# Altium PCB SolarArray3.PcbDoc
Units mm, origin at the board's own origin, x right, y up, seen from the top; angles counter-clockwise.
Board outline 82 x 320 mm, 2 copper layers (Top Layer, Bottom Layer), stack 1.567 mm thick; 65 components, 36 nets, 162 pads, 0 vias.
Unrouted connection lines stored in the file: 79.
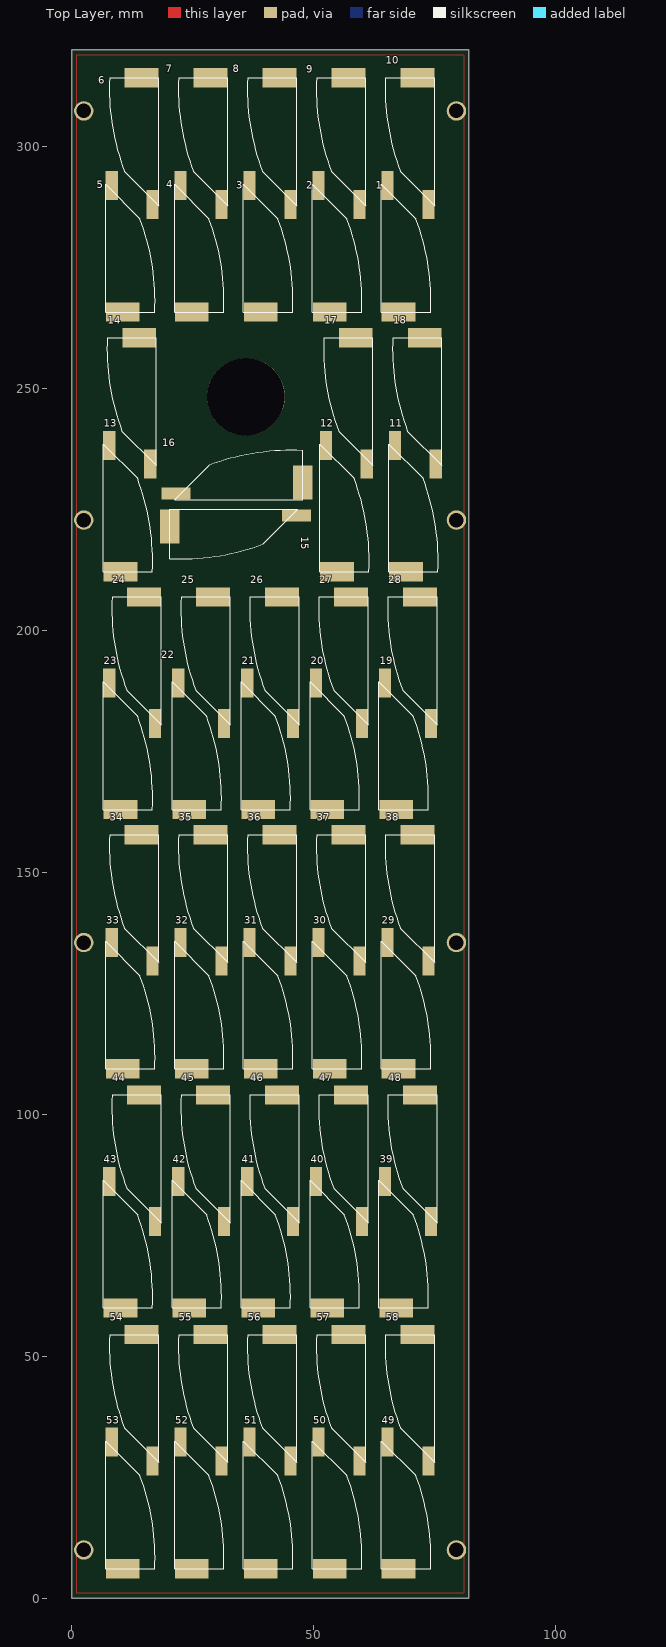
[diagram p0: Top Layer view]
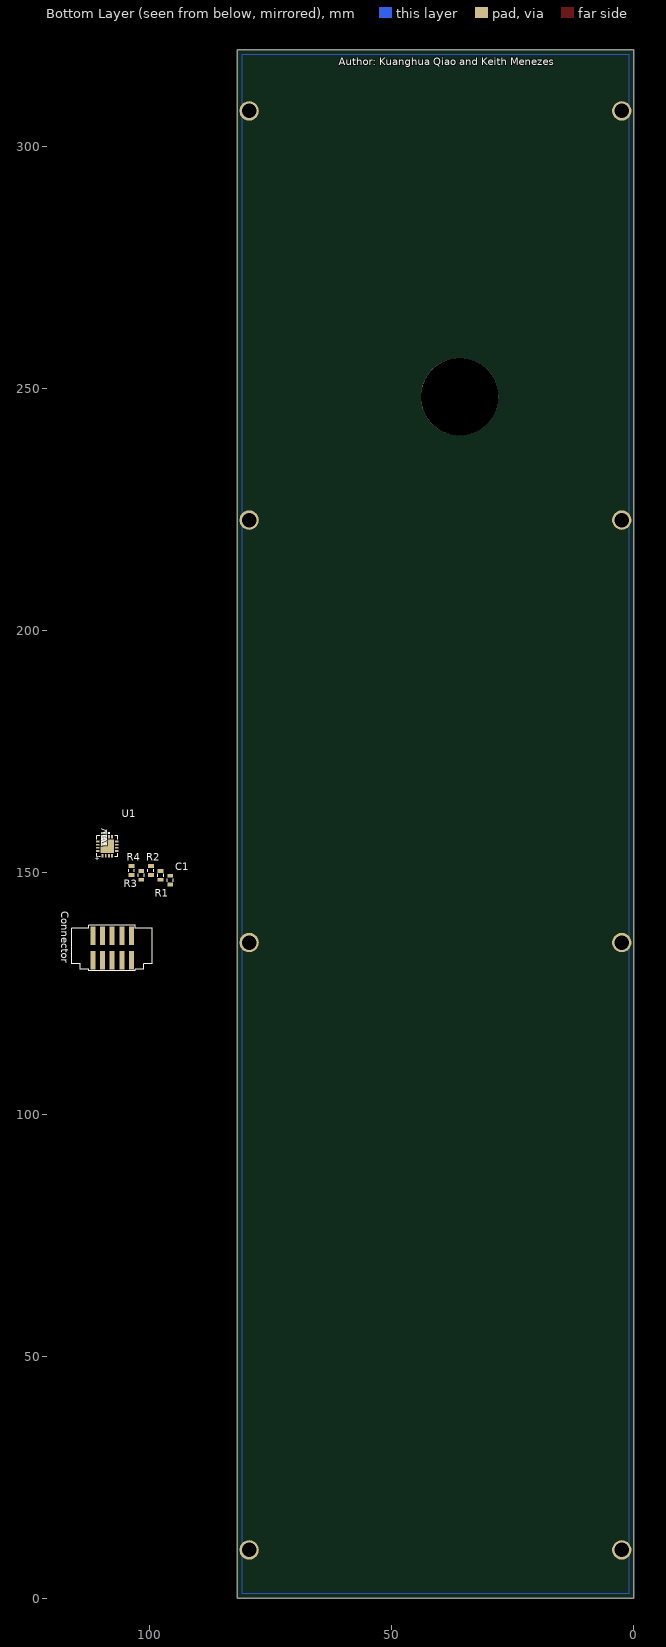
[diagram p1: Bottom Layer view, seen from below]

## Layer stack, top to bottom
Top Solder: solder mask 0.0102, Solder Resist, Dk 3.5
Top Layer: signal copper 0.0356
Dielectric 1: dielectric 1.4961, FR-4, Dk 4.8
Bottom Layer: signal copper 0.0356
Bottom Solder: solder mask 0.0102, Solder Resist, Dk 3.5

## Board outline
82,0 82,320 0,320 0,0

## Design rules (kind name [scope] priority, off if disabled: settings)
Clearance [All] p1: gap=0.254 ignorepadtopadclearanceinfootprint=FALSE except(0: Arc-Hole Track-Hole SMDPad-Hole THPad-Hole Via-Hole Fill-Hole Poly-Hole Region-Hole Text-Hole)
PolygonConnect [All] p1: connectstyle=Relief reliefconductorwidth=0.254 reliefentries=4 polygonreliefangle="90 Angle" airgapwidth=0.254
RoutingVias [All] p1: holewidth=0.711 width=1.27 viastyle="Through Hole" minholewidth=0.711 minwidth=1.27 maxholewidth=0.711 maxwidth=1.27
SolderMaskExpansion [All] p1: expansion=0.102
Width [All] p1: maxlimit=1 minlimit=0.254 preferedwidth=0.254 minimp=50.000000 maximp=50.000000 favimp=50.000000
30 further rules are at their usual default settings.

## Components (designator, comment, footprint, x,y, rotation, side; value= is the part's Value field where it differs from the comment)
1 "Trisol X Solar Wing" PCBCOMPONENT_1 64,295 r270 top
2 "Trisol X Solar Wing" PCBCOMPONENT_1 49.75,295 r270 top
3 "Trisol X Solar Wing" PCBCOMPONENT_1 35.5,295 r270 top
4 "Trisol X Solar Wing" PCBCOMPONENT_1 21.25,295 r270 top
5 "Trisol X Solar Wing" PCBCOMPONENT_1 7,295 r270 top
6 "Trisol X Solar Wing" PCBCOMPONENT_1 18,285 r90 top
7 "Trisol X Solar Wing" PCBCOMPONENT_1 32.25,285 r90 top
8 "Trisol X Solar Wing" PCBCOMPONENT_1 46.5,285 r90 top
9 "Trisol X Solar Wing" PCBCOMPONENT_1 60.75,285 r90 top
10 "Trisol X Solar Wing" PCBCOMPONENT_1 75,285 r90 top
11 "Trisol X Solar Wing" PCBCOMPONENT_1 65.5,241.3 r270 top
12 "Trisol X Solar Wing" PCBCOMPONENT_1 51.25,241.3 r270 top
13 "Trisol X Solar Wing" PCBCOMPONENT_1 6.5,241.3 r270 top
14 "Trisol X Solar Wing" PCBCOMPONENT_1 17.5,231.3 r90 top
15 "Trisol X Solar Wing" PCBCOMPONENT_1 49.5,225 r180 top
16 "Trisol X Solar Wing" PCBCOMPONENT_1 18.5,227 r0 top
17 "Trisol X Solar Wing" PCBCOMPONENT_1 62.25,231.3 r90 top
18 "Trisol X Solar Wing" PCBCOMPONENT_1 76.5,231.3 r90 top
19 "Trisol X Solar Wing" PCBCOMPONENT_1 63.5,192.2 r270 top
20 "Trisol X Solar Wing" PCBCOMPONENT_1 49.25,192.2 r270 top
21 "Trisol X Solar Wing" PCBCOMPONENT_1 35,192.2 r270 top
22 "Trisol X Solar Wing" PCBCOMPONENT_1 20.75,192.2 r270 top
23 "Trisol X Solar Wing" PCBCOMPONENT_1 6.5,192.2 r270 top
24 "Trisol X Solar Wing" PCBCOMPONENT_1 18.5,177.7 r90 top
25 "Trisol X Solar Wing" PCBCOMPONENT_1 32.75,177.7 r90 top
26 "Trisol X Solar Wing" PCBCOMPONENT_1 47,177.7 r90 top
27 "Trisol X Solar Wing" PCBCOMPONENT_1 61.25,177.7 r90 top
28 "Trisol X Solar Wing" PCBCOMPONENT_1 75.5,177.7 r90 top
29 "Trisol X Solar Wing" PCBCOMPONENT_1 64,138.6 r270 top
30 "Trisol X Solar Wing" PCBCOMPONENT_1 49.75,138.6 r270 top
31 "Trisol X Solar Wing" PCBCOMPONENT_1 35.5,138.6 r270 top
32 "Trisol X Solar Wing" PCBCOMPONENT_1 21.25,138.6 r270 top
33 "Trisol X Solar Wing" PCBCOMPONENT_1 7,138.6 r270 top
34 "Trisol X Solar Wing" PCBCOMPONENT_1 18,128.6 r90 top
35 "Trisol X Solar Wing" PCBCOMPONENT_1 32.25,128.6 r90 top
36 "Trisol X Solar Wing" PCBCOMPONENT_1 46.5,128.6 r90 top
37 "Trisol X Solar Wing" PCBCOMPONENT_1 60.75,128.6 r90 top
38 "Trisol X Solar Wing" PCBCOMPONENT_1 75,128.6 r90 top
39 "Trisol X Solar Wing" PCBCOMPONENT_1 63.5,89.2 r270 top
40 "Trisol X Solar Wing" PCBCOMPONENT_1 49.25,89.2 r270 top
41 "Trisol X Solar Wing" PCBCOMPONENT_1 35,89.2 r270 top
42 "Trisol X Solar Wing" PCBCOMPONENT_1 20.75,89.2 r270 top
43 "Trisol X Solar Wing" PCBCOMPONENT_1 6.5,89.2 r270 top
44 "Trisol X Solar Wing" PCBCOMPONENT_1 18.5,74.8 r90 top
45 "Trisol X Solar Wing" PCBCOMPONENT_1 32.75,74.8 r90 top
46 "Trisol X Solar Wing" PCBCOMPONENT_1 47,74.8 r90 top
47 "Trisol X Solar Wing" PCBCOMPONENT_1 61.25,74.8 r90 top
48 "Trisol X Solar Wing" PCBCOMPONENT_1 75.5,74.8 r90 top
49 "Trisol X Solar Wing" PCBCOMPONENT_1 64,35.3 r270 top
50 "Trisol X Solar Wing" PCBCOMPONENT_1 49.75,35.3 r270 top
51 "Trisol X Solar Wing" PCBCOMPONENT_1 35.5,35.3 r270 top
52 "Trisol X Solar Wing" PCBCOMPONENT_1 21.25,35.3 r270 top
53 "Trisol X Solar Wing" PCBCOMPONENT_1 7,35.3 r270 top
54 "Trisol X Solar Wing" PCBCOMPONENT_1 18,25.3 r90 top
55 "Trisol X Solar Wing" PCBCOMPONENT_1 32.25,25.3 r90 top
56 "Trisol X Solar Wing" PCBCOMPONENT_1 46.5,25.3 r90 top
57 "Trisol X Solar Wing" PCBCOMPONENT_1 60.75,25.3 r90 top
58 "Trisol X Solar Wing" PCBCOMPONENT_1 75,25.3 r90 top
C1 "100pF" 0805 95.8,148.4 r270 bottom
Connector "T2M-105-01-L-D-SM" T2M-105-01-X-D-SM 107.8,134.4 r180 bottom
R1 "1K" 0805 97.8,149.4 r270 bottom
R2 "1K" 0805 99.8,150.4 r270 bottom
R3 "1K" 0805 101.8,149.4 r270 bottom
R4 "1K" 0805 103.8,150.4 r270 bottom
U1 "ADT7420UCPZ-R2" CP_16_17 108.8,155.4 r90 bottom

## Footprints (in the part's own frame and the unit in brackets; to place one, negate y for a bottom-side part, rotate by r counter-clockwise, add the part's x,y. Pads: shape width x height; smd on the part's side, far side on the other; paste and mask are expansions set on the pad)
0805 [mil]
  rect 32x48 smd: 1(-35.43,0) 2(36,0)
  silkscreen extent -12,-24 12,24
CP_16_17 [mil]
  rect 30x14 smd: 1(-77.5,38.39) 2(-77.5,12.8) 3(-77.5,-12.8) 4(-77.5,-38.39) 9(77.5,-38.39) 10(77.5,-12.8) 11(77.5,12.8) 12(77.5,38.39)
  rect 14x30 smd: 5(-38.39,-77.5) 6(-12.8,-77.5) 7(12.8,-77.5) 8(38.39,-77.5) 13(38.39,77.5) 14(12.8,77.5) 15(-12.8,77.5) 16(-38.39,77.5)
  rect 110x110 smd paste-54.5: 17(0,0)
  silkscreen extent -86,-86 112,86, body extent 0,0 10,10, height 10
PCBCOMPONENT_1 [mm]
  rect 6x2.5 smd: 0(3.048,1.27)
  rect 4x6.985 smd: 1(29.21,3.556)
  silkscreen extent 2.79,0 29.21,10.22, body extent 2.89,0.06 29.19,10.1, height 0.24
T2M-105-01-X-D-SM [mm]
  rect 1.02x3.8 smd mask+0.05: 1(-4,-2.535) 2(-4,2.535) 3(-2,-2.535) 4(-2,2.535) 5(0,-2.535) 6(0,2.535) 7(2,-2.535) 8(2,2.535) 9(4,-2.535) 10(4,2.535)
  silkscreen extent -8.36,-4.69 8.31,4.69, body extent -7.84,-4.31 7.84,4.31, height 6.5

## Part data
C1: library part CAP0805_1nF
Connector: library part T2M-105-01-X-D-SM
R1 R2 R3 R4: library part RESISTOR0805-RES_1K
U1: "Imported"

## Free pads (board coordinates)
  round 4 hole 3: 1(2.5,10) 1(2.5,135.5) 1(2.5,222.8) 1(2.5,307.35) 1(79.5,10) 1(79.5,135.5) 1(79.5,222.8) 1(79.5,307.35)
  round 16 hole 16: 1(36,248.3)

## Nets (pads, with @x,y where several pads share a name; then routed paths per layer and width w, separated by ;. In a path a pad name is that pad's centre, name@x,y a point inside that pad or via, vN(x,y) a via of type N, cw(c..) or ccw(c..) an arc to the next point about the centre after c; other vN are vias at no path point)
Net1_0: 1.0 10.1
Net1_1: 1.1 2.1 3.1 4.1 5.1 11.1 12.1 14.1 15.1 19.1 20.1 21.1 22.1 23.1 29.1 30.1 31.1 32.1 33.1 39.1 40.1 41.1 42.1 43.1 49.1 50.1 51.1 52.1 53.1 C1.1 Connector.3 Connector.4 pad.1@2.5,10 pad.1@2.5,135.5 pad.1@2.5,222.8 pad.1@2.5,307.35 pad.1@79.5,10 pad.1@79.5,135.5 pad.1@79.5,222.8 pad.1@79.5,307.35 R2.2 R4.2 U1.11
Net2_0: 2.0 9.1
Net3_0: 3.0 8.1
Net4_0: 4.0 7.1
Net5_0: 5.0 6.1
Net6_0: 6.0 7.0 8.0 9.0 10.0 13.0 16.0 17.0 18.0 24.0 25.0 26.0 27.0 28.0 34.0 35.0 36.0 37.0 38.0 44.0 45.0 46.0 47.0 48.0 54.0 55.0 56.0 57.0 58.0 Connector.1 Connector.2
Net11_0: 11.0 18.1
Net12_0: 12.0 17.1
Net13_1: 13.1 14.0
Net15_0: 15.0 16.1
Net19_0: 19.0 28.1
Net20_0: 20.0 27.1
Net21_0: 21.0 26.1
Net22_0: 22.0 25.1
Net23_0: 23.0 24.1
Net29_0: 29.0 38.1
Net30_0: 30.0 37.1
Net31_0: 31.0 36.1
Net32_0: 32.0 35.1
Net33_0: 33.0 34.1
Net39_0: 39.0 48.1
Net40_0: 40.0 47.1
Net41_0: 41.0 46.1
Net42_0: 42.0 45.1
Net43_0: 43.0 44.1
Net49_0: 49.0 58.1
Net50_0: 50.0 57.1
Net51_0: 51.0 56.1
Net52_0: 52.0 55.1
Net53_0: 53.0 54.1
NetC1_2: C1.2 Connector.5 Connector.6 R1.2 R3.2 U1.12
NetConnector_7: Connector.7 Connector.8 U1.2
NetConnector_9: Connector.9 Connector.10 U1.1
NetR1_1: R1.1 R2.1 U1.4
NetR3_1: R3.1 R4.1 U1.3
pads on no net: U1.5 U1.6 U1.7 U1.8 U1.9 U1.10 U1.13 U1.14 U1.15 U1.16 U1.17

## Polygon pours and split planes (outlines as drawn)
Net6_0 on Top Layer "Array_pos" (solid, shelved, pour order 9): 81,1 1,1 1,319 81,319
Net1_1 on Bottom Layer "Array_neg" (solid, shelved, pour order 4): 1,319 81,319 81,1 1,1

## Silkscreen, mask and mechanical layers (free items; w line width, h text height)
Bottom Overlay:
  text "Author: Kuanghua Qiao and Keith Menezes" at 61,316.8 h1.52

## Text inside footprints (layer, text, board x,y; h text height)
Connector: Mechanical 1 "J1" at 108.297,133.892 h0.76
U1: Bottom Overlay "TOL" at 108.8,155.4 h1.27 r270; Bottom Overlay "VAL" at 108.8,155.4 h1.27 r270; Bottom Overlay "DEV" at 108.8,155.4 h1.27 r270; Bottom Overlay "PN" at 108.8,155.4 h1.27 r270; Bottom Overlay "*" at 110.1,152.416 h1.27 r270; Mechanical 13 "RefDes2" at 108.8,155.4 h1.27 r270; Mechanical 13 "*" at 110.1,153.813 h1.27 r270